# Altium PCB Board_PCB.PcbDoc
Units mm, origin at the board's own origin, x right, y up, seen from the top; angles counter-clockwise.
Board outline 36 x 36 mm, 4 copper layers (L1 (Signal), L2 (GND), L3 (GND), L4 (Signal)), stack 1.586 mm thick; 37 components, 28 nets, 174 pads, 111 vias.
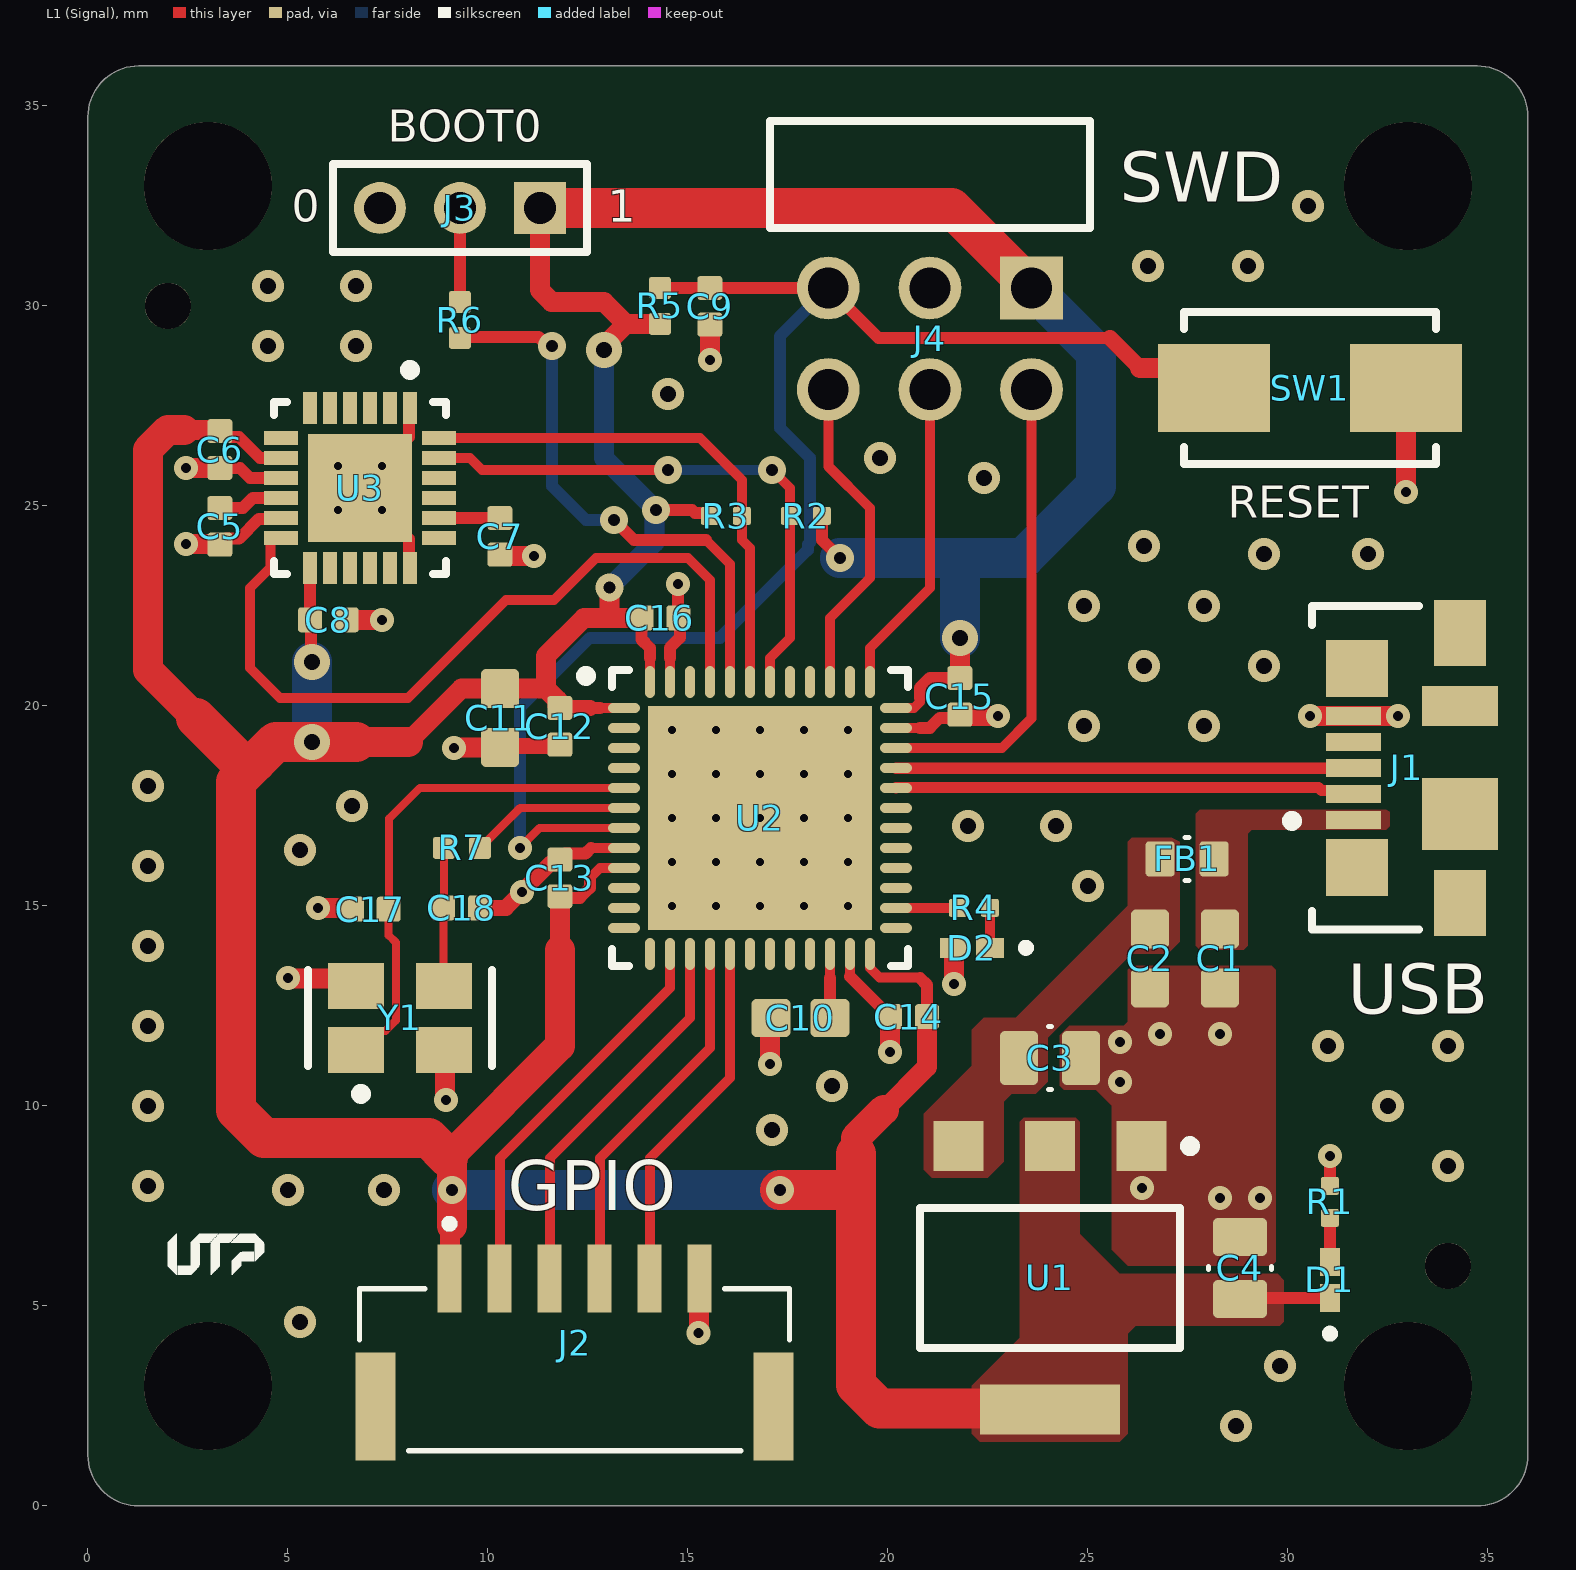
[diagram p0: L1 (Signal) view]
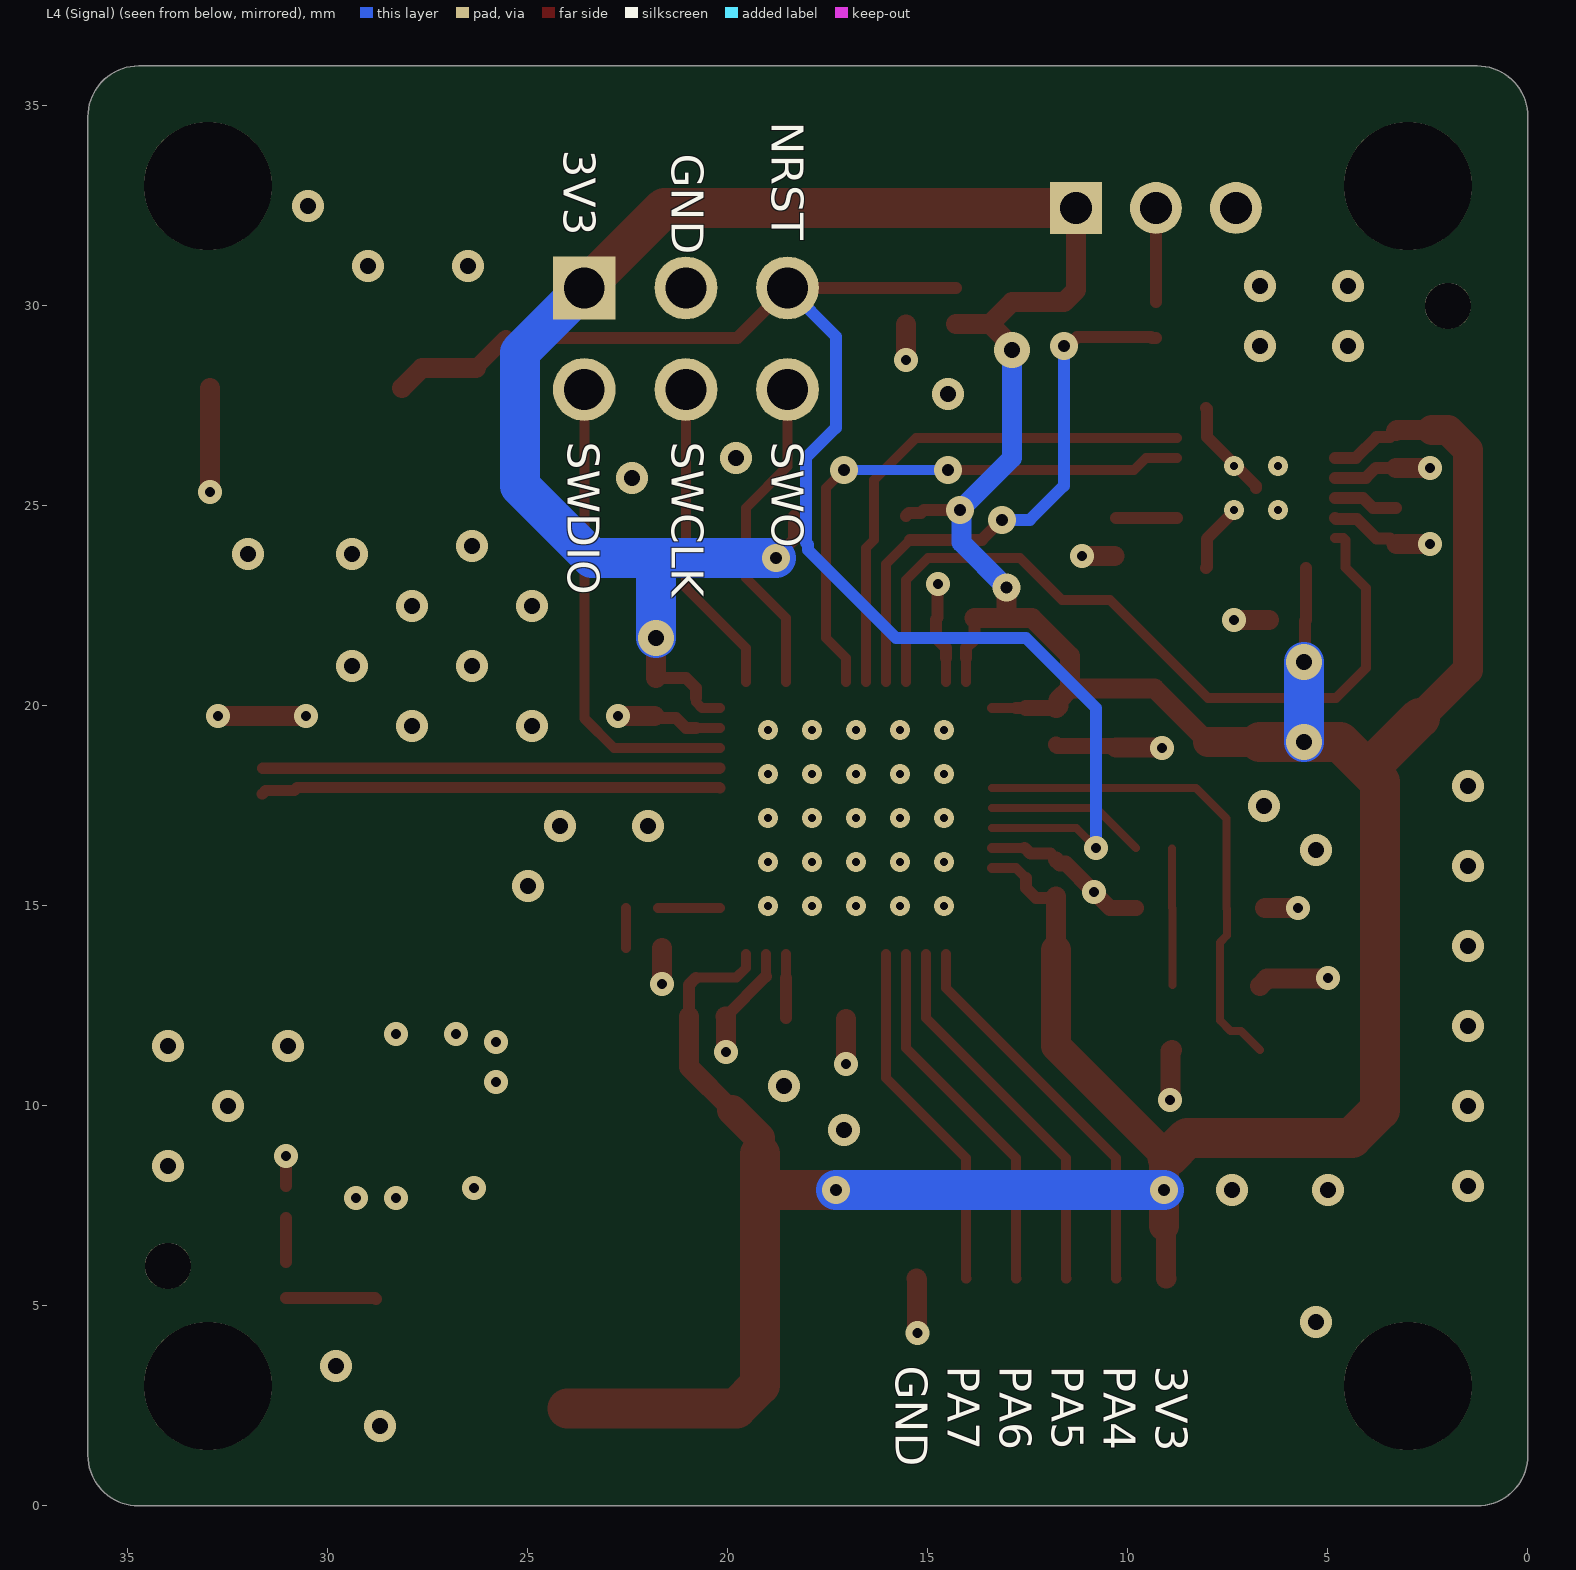
[diagram p1: L4 (Signal) view, seen from below]
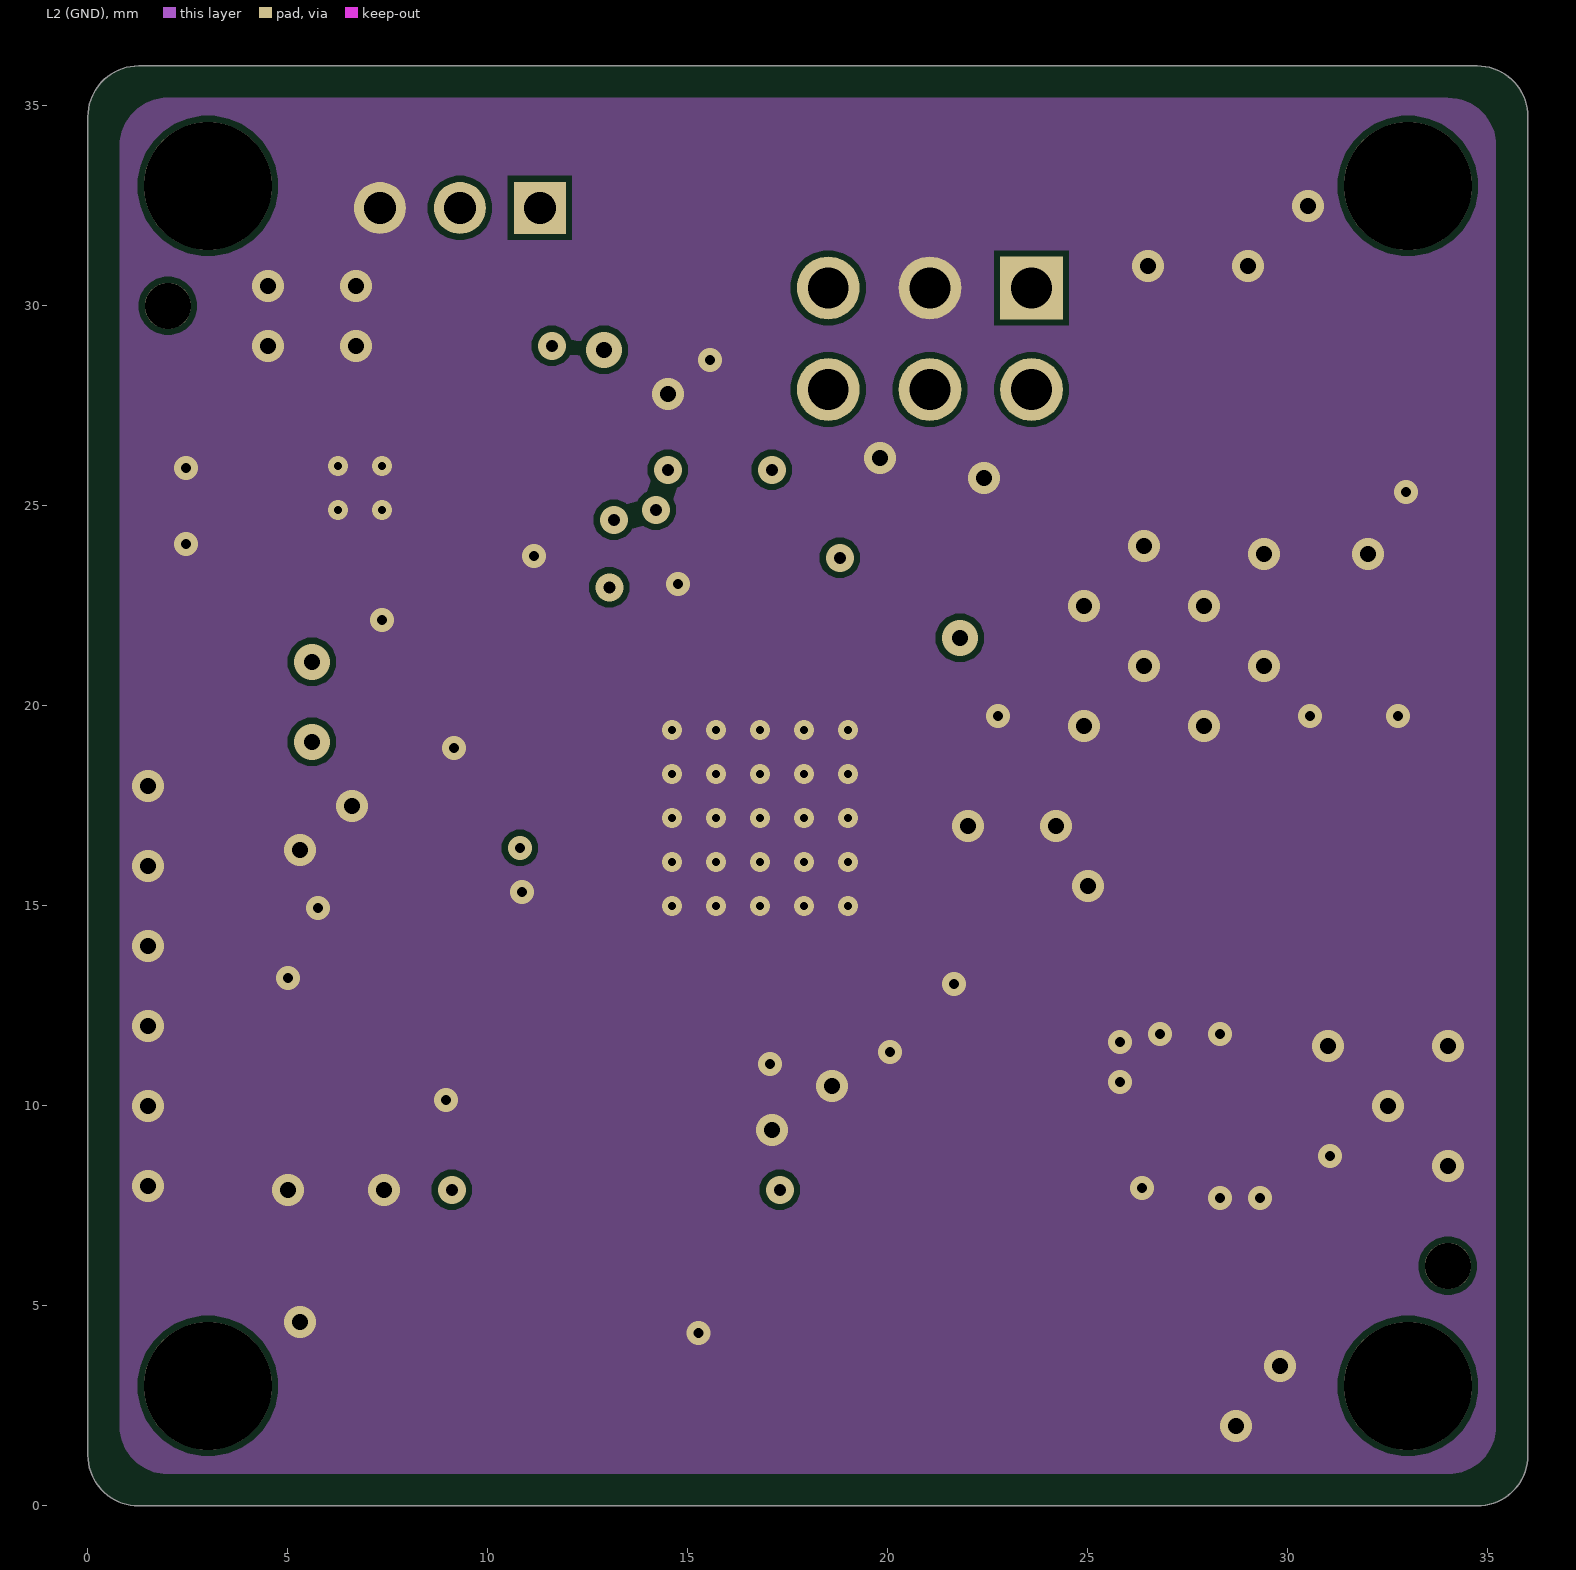
[diagram p2: L2 (GND)]
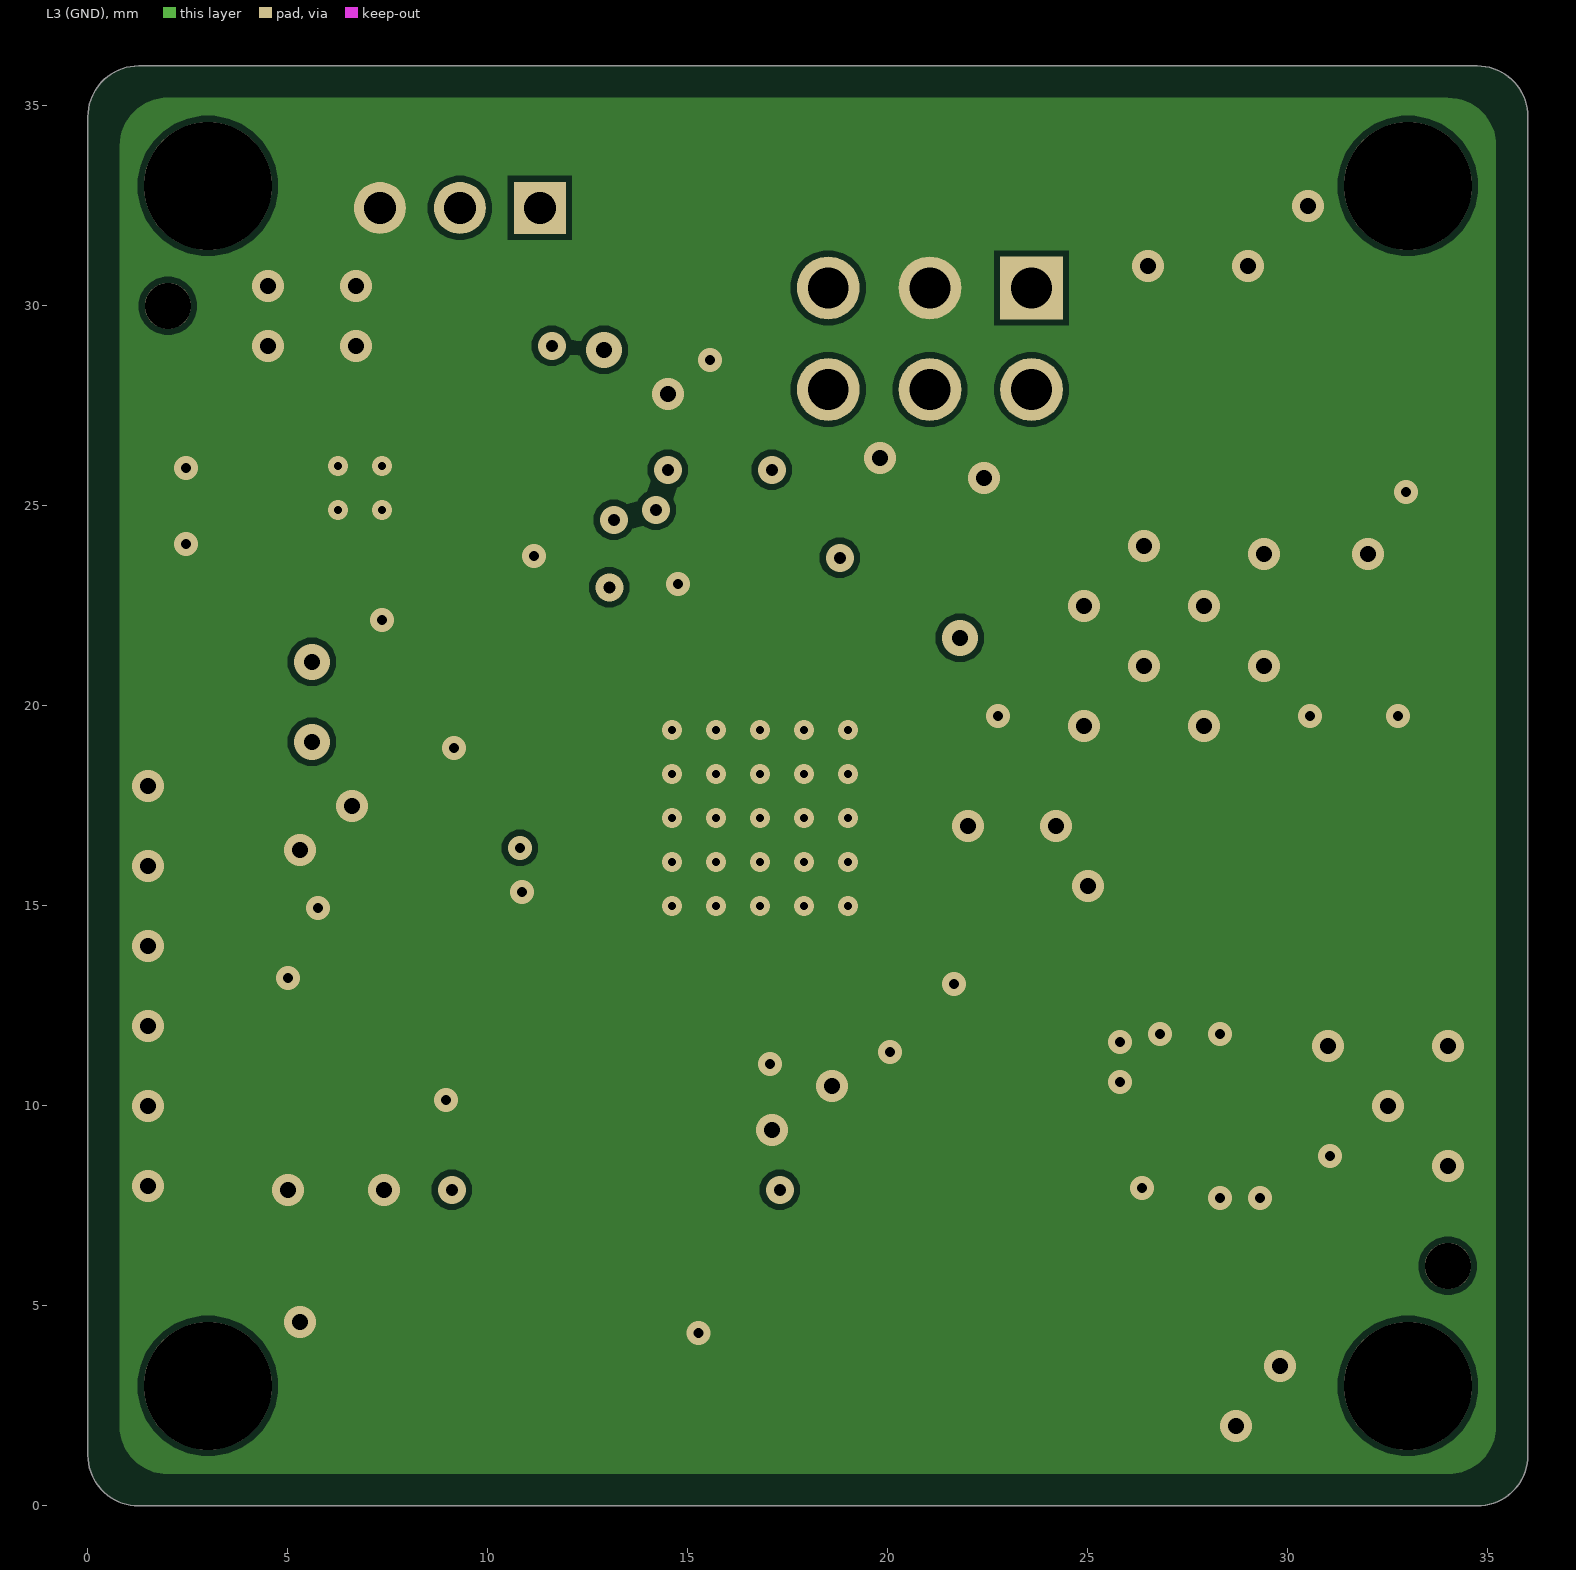
[diagram p3: L3 (GND)]
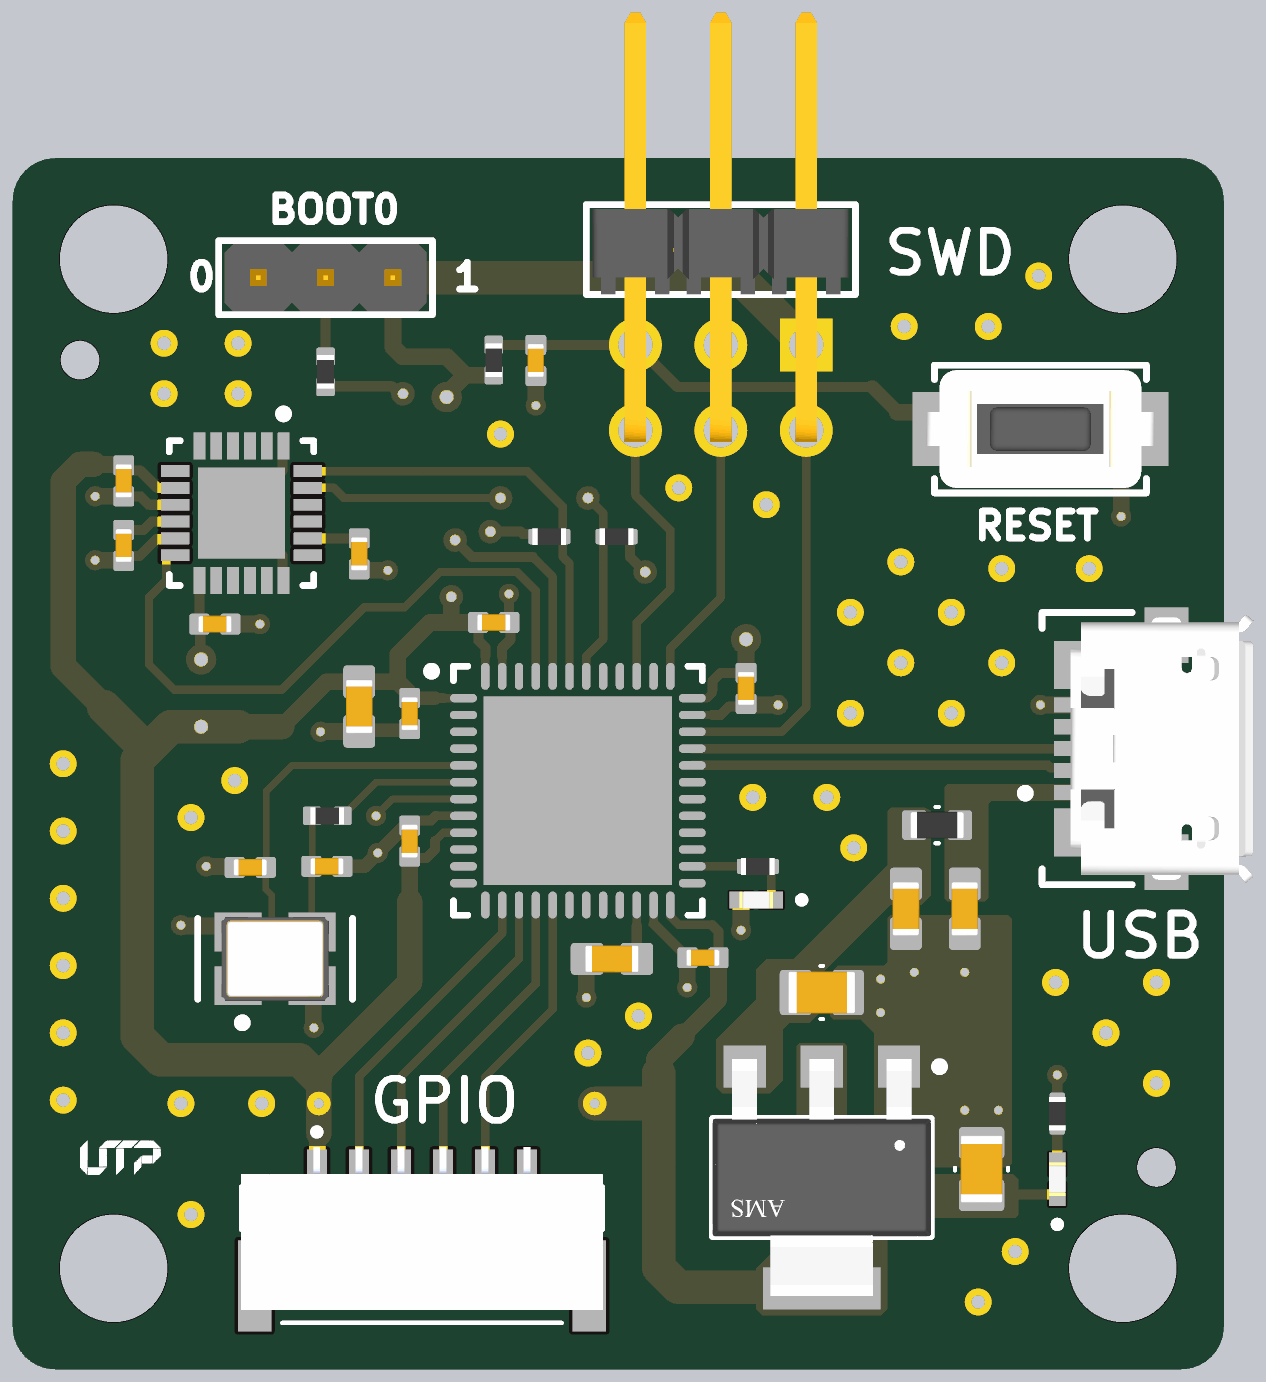
[diagram p4: 3D render of the assembled board from above, using the file's embedded part models]

## Layer stack, top to bottom
Top Solder: solder mask 0.0254, SM-001, Dk 4
L1 (Signal): signal copper 0.035
Dielectric 1: prepreg 0.2104, PP-023, Dk 4.4
L2 (GND): signal copper 0.0152
Dielectric 3: core 1.065, Core-039, Dk 4.6
L3 (GND): signal copper 0.0152
Dielectric 5: prepreg 0.2104, PP-023, Dk 4.4
L4 (Signal): signal copper 0.035
Bottom Solder: solder mask 0.0254, SM-001, Dk 4

## Board outline
0,1.27 ccw(c1.27,1.27) 1.27,0 34.73,0 ccw(c34.73,1.27) 36,1.27 36,34.73 ccw(c34.73,34.73) 34.73,36 1.27,36 ccw(c1.27,34.73) 0,34.73

## Design rules (kind name [scope] priority, off if disabled: settings)
Clearance [All] p1: gap=0.15 ignorepadtopadclearanceinfootprint=TRUE except(0.1: SMDPad-SMDPad; 0.2: Arc-Via Track-Via Via-Via; 0.28: Arc-Hole Track-Hole; 0.45: THPad-THPad)
DiffPairsRouting [All] p1: maxlimit=0.254 minlimit=0.203 mostfreqgap=0.254 toplayer_maxgap=0.203 toplayer_prefgap=0.203 toplayer_minwidth=0.281 toplayer_maxwidth=0.281 toplayer_prefwidth=0.281 bottomlayer_maxgap=0.203 bottomlayer_prefgap=0.203 bottomlayer_minwidth=0.281 bottomlayer_maxwidth=0.281 bottomlayer_prefwidth=0.281 impedanceprofiledriven=TRUE impedanceprofileid={2F17219D-EB1B-4663-A314-4BCB82F3F085} impedanceprofilevalue=90.000000 maxuncoupledlength=12.7
HoleSize [All] p1: absolutevalues=TRUE maxlimit=5.8 minlimit=0.2 maxpercent=80.000 minpercent=20.000
PolygonConnect [All] p1: connectstyle=Direct reliefconductorwidth=0.254 reliefentries=4 polygonreliefangle="90 Angle" airgapwidth=0.254
RoutingVias [All] p1: holewidth=0.3 width=0.7 viastyle="Through Hole" minholewidth=0.2 minwidth=0.5 maxholewidth=0.4 maxwidth=0.9
SolderMaskExpansion [All] p1: expansion=0 istentingtop=FALSE
SupplyNets "Schematic Supply Nets_3" [InNet('VBUS')] p1: voltage=0.000
SupplyNets "Schematic Supply Nets_2" [InNet('+3V3')] p2: voltage=0.000
SupplyNets "Schematic Supply Nets_1" [InNet('GND')] p3: voltage=0.000
SupplyNets "Schematic Supply Nets" [InNet('+5')] p4: voltage=0.000
UnRoutedNet [All] p1: checkbadconnections=TRUE
Width [All] p1: maxlimit=1 minlimit=0.2 preferedwidth=0.3 midlayer1_minwidth=0.254 midlayer1_maxwidth=0.254 midlayer1_prefwidth=0.254 midlayer2_minwidth=0.254 midlayer2_maxwidth=0.254 midlayer2_prefwidth=0.254 minimp=50.000000 maximp=50.000000 favimp=50.000000
27 further rules are at their usual default settings.

## Classes and differential pairs
differential pair class DIFF_USB: USB_D
differential pair USB_D: +USB_D_P -USB_D_N

## Components (designator, comment, footprint, x,y, rotation, side; value= is the part's Value field where it differs from the comment)
C1 "2.2uF" CAPC1608X90N 28.3,13.688 r270 top
C2 "2.2uF" CAPC1608X90N 26.55,13.688 r270 top
C3 "22uF" CAPC2012X95L 24.05,11.2 r0 top
C4 "22uF" CAPC2012X95L 28.8,5.95 r90 top
C5 "100nF" CAPC1005X55N 3.3,24.49 r270 top
C6 "10nF" CAPC1005X55N 3.3,26.41 r270 top
C7 "2.2nF" CAPC1005X55N 10.3,24.24 r270 top
C8 "100nF" CAPC1005X55N 6.01,22.15 r0 top
C9 "100nF" CAPC1005X55N 15.55,29.99 r270 top
C10 "2.2uF" CAPC1608X90N 17.813,12.2 r180 top
C11 "2.2uF" CAPC1608X90N 10.3,19.7 r270 top
C12 "100nF" CAPC1005X55N 11.8,19.49 r270 top
C13 "100nF" CAPC1005X55N 11.8,15.7 r90 top
C14 "100nF" CAPC1005X55N 20.517,12.233 r180 top
C15 "100nF" CAPC1005X55N 21.8,20.24 r270 top
C16 "100nF" CAPC1005X55N 14.3,22.2 r0 top
C17 "10pF" CAPC1005X55N 7.06,14.92 r180 top
C18 "10pF" CAPC1005X55N 9.34,14.95 r0 top
D1 "LED_0402_RED" LEDC0402 31.05,5.65 r90 top
D2 "LED_0402_GREEN" LEDC0402 22.1,13.95 r180 top
FB1 "120R" FBC1608X95L 27.48,16.175 r180 top
J1 "473460001" FP-473460001-MFG 33.95,18.45 r90 top
J2 "SM06B-GHS-TB" SM06B-GHS-TB 12.165,3.804 r0 top
J3 "M22-2010305" FP-M22-2010305-MFG 9.3,32.45 r180 top
J4 "TSW-103-08-G-D-RA" FP-TSW-103-08-G-D-RA-MFG 21.05,33.22 r180 top
R1 "1k" RESC1005X37L 31.05,7.6 r90 top
R2 "2k2" RESC1005X37L 17.95,24.75 r180 top
R3 "2k2" RESC1005X37L 15.95,24.75 r0 top
R4 "1k" RESC1005X37L 22.15,14.95 r0 top
R5 "10k" RESC1005X37N 14.3,30 r90 top
R6 "100k" RESC1005X37N 9.3,29.65 r90 top
R7 "0R" RESC1005X37N 9.35,16.45 r0 top
SW1 "147873-2" FP-147873-2-MFG 30.55,27.95 r0 top
U1 "AMS1117-3.3" FP-AMS1117-IPC_C 24.05,5.7 r270 top
U2 "STM32F411CEU6" STM-UFQFPN48_L 16.8,17.2 r0 top
U3 "MPU-6050" IS-QFN-24_V 6.8,25.45 r270 top
Y1 "24MHz" FP-TSX-3225-MFG 7.8,12.2 r0 top

## Footprints (in the part's own frame and the unit in brackets; to place one, negate y for a bottom-side part, rotate by r counter-clockwise, add the part's x,y. Pads: shape width x height; smd on the part's side, far side on the other; paste and mask are expansions set on the pad)
CAPC1005X55N [mm] "Chip Capacitor, 2-Leads, Body 1,00x0,50mm, IPC Medium Density"
  rrect25% 0.6x0.62 smd: 1(-0.46,0) 2(0.46,0)
  body extent -0.5,-0.25 0.5,0.25, height 0.55
CAPC1608X90N [mm] "Chip Capacitor, 2-Leads, Body 1,60x0,80mm, IPC Medium Density"
  rrect25% 0.975x0.95 smd: 1(-0.737,0) 2(0.738,0)
  body extent -0.8,-0.4 0.8,0.4, height 0.9
CAPC2012X95L [mm] "Chip Capacitor, 2-Leads, Body 2,00x1,25mm, IPC High Density"
  rrect25% 0.95x1.35 smd: 1(-0.775,0) 2(0.775,0)
  silkscreen extent -0.04,-0.79 0.04,0.79, body extent -1,-0.63 1,0.63, height 0.95
FBC1608X95L [mm] "Chip Ferrite Bead, 2-Leads, Body 1,60x0,80mm, IPC High Density"
  rrect25% 0.73x0.88 smd: 1(-0.675,0) 2(0.675,0)
  silkscreen extent -0.05,-0.54 0.05,0.54, body extent -0.8,-0.4 0.8,0.4, height 0.95
FP-147873-2-MFG [mm]
  rect 2.8x2.2 smd paste+0 mask+0: 1(-2.4,0) 2(2.4,0)
  silkscreen extent -3.15,-1.9 3.15,1.9, body extent -3.9,-2 3.9,2, height 0.25
FP-473460001-MFG [mm]
  rect 0.45x1.38 smd paste+0 mask+0: 1(-1.3,2.31) 2(-0.65,2.31) 3(0,2.31) 4(0.65,2.31) 5(1.3,2.31)
  rect 1.425x1.55 smd paste+0 mask+0: 6(-2.488,2.225) 7(2.488,2.225)
  rect 1.65x1.3 smd paste+0 mask+0: 8(-3.375,-0.35) 11(3.375,-0.35)
  rect 1.8x1.9 smd paste+0 mask+0: 9(-1.15,-0.35)
  rect 1x1.9 smd paste+0 mask+0: 10(1.55,-0.35)
  silkscreen extent -4.05,0.67 4.05,3.97, body extent -4.3,-2.48 4.3,3.45, height 0.25
FP-AMS1117-IPC_C [mm]
  rect 1.25x1.25 smd paste+0 mask+0: 1(-3.295,2.29) 2(-3.295,0) 3(-3.295,-2.29)
  rect 1.25x3.5 smd paste+0 mask+0: 4(3.295,0)
  silkscreen extent -3.42,-3.25 1.75,3.63, body extent -3.9,-3.35 3.9,3.35, height 0.25
FP-M22-2010305-MFG [mm]
  rect 1.3x1.3 hole 0.8 paste-2539.97 mask+0: 1(-2,0)
  round 1.3 hole 0.8 paste-2539.97 mask+0: 2(0,0) 3(2,0)
  silkscreen extent -3.17,-1.1 3.17,1.1, body extent -3.27,-1.2 3.27,1.2, height 0.25
FP-TSW-103-08-G-D-RA-MFG [mm]
  rect 1.57x1.57 hole 1.02 paste-2539.97 mask+0: 1(-2.54,2.77)
  round 1.57 hole 1.02 paste-2539.97 mask+0: 2(-2.54,5.31) 3(0,2.77) 4(0,5.31) 5(2.54,2.77) 6(2.54,5.31)
  silkscreen extent -4,-1.4 4,1.27, body extent -4.1,-7.54 4.1,6.19, height 0.25
FP-TSX-3225-MFG [mm]
  rect 1.4x1.15 smd paste+0 mask+0: 1(-1.1,-0.8) 2(1.1,-0.8) 3(1.1,0.8) 4(-1.1,0.8)
  silkscreen extent -2.3,-2.02 2.3,1.2, body extent -1.9,-1.48 1.9,1.48, height 0.25
IS-QFN-24_V [mm] "QFN, 24-Leads, Body 4x4mm, Pitch 0.5mm, Thermal Pad 2.7x2.6mm"
  rect 0.8x0.35 smd: 1(-2,1.25) 2(-2,0.75) 3(-2,0.25) 4(-2,-0.25) 5(-2,-0.75) 6(-2,-1.25) 13(2,-1.25) 14(2,-0.75) 15(2,-0.25) 16(2,0.25) 17(2,0.75) 18(2,1.25)
  rect 0.35x0.85 smd mask+0.102: 7(-1.25,-1.975) 8(-0.75,-1.975) 9(-0.25,-1.975) 10(0.25,-1.975) 11(0.75,-1.975) 12(1.25,-1.975) 19(1.25,1.975) 20(0.75,1.975) 21(0.25,1.975) 22(-0.25,1.975) 23(-0.75,1.975) 24(-1.25,1.975)
  rect 2.7x2.6 smd: 25(0,0)
  silkscreen extent -3.07,-2.15 2.15,2.15, body extent -2,-2 2,2, height 0.95
LEDC0402 [mm]
  rect 0.7x0.5 smd mask+0.05: 1(-0.45,0) 2(0.45,0)
  silkscreen extent -1.44,-0.1 -1.24,0.1, body extent -0.5,-0.25 0.5,0.25, height 0.5
RESC1005X37L [mm] "Chip Resistor, 2-Leads, Body 1,00x0,50mm, IPC High Density"
  rrect25% 0.45x0.45 smd: 1(-0.4,0) 2(0.4,0)
  body extent -0.5,-0.25 0.5,0.25, height 0.37
RESC1005X37N [mm] "Chip Resistor, 2-Leads, Body 1,00x0,50mm, IPC Medium Density"
  rrect25% 0.55x0.55 smd: 1(-0.45,0) 2(0.45,0)
  body extent -0.5,-0.25 0.5,0.25, height 0.37
SM06B-GHS-TB [mm]
  rect 0.6x1.7 smd paste+0 mask+0.102: 1(-3.125,1.875) 2(-1.875,1.875) 3(-0.625,1.875) 4(0.625,1.875) 5(1.875,1.875) 6(3.125,1.875)
  rect 1x2.7 smd paste+0 mask+0.102: MP1(-4.975,-1.325) MP2(4.975,-1.325)
  silkscreen extent -5.38,-2.42 5.38,3.35, body extent -5.38,-2.05 5.38,2.8, height 4.25
STM-UFQFPN48_L [mm] "QFN, 48-Leads, Body 7.1x7.1mm, Pitch 0.5mm, Thermal Pad 5.6x5.6mm, IPC High Density"
  oval 0.8x0.25 smd: 1(-3.4,2.75) 2(-3.4,2.25) 3(-3.4,1.75) 4(-3.4,1.25) 5(-3.4,0.75) 6(-3.4,0.25) 7(-3.4,-0.25) 8(-3.4,-0.75) 9(-3.4,-1.25) 10(-3.4,-1.75) 11(-3.4,-2.25) 12(-3.4,-2.75) 25(3.4,-2.75) 26(3.4,-2.25) 27(3.4,-1.75) 28(3.4,-1.25) 29(3.4,-0.75) 30(3.4,-0.25) 31(3.4,0.25) 32(3.4,0.75) 33(3.4,1.25) 34(3.4,1.75) 35(3.4,2.25) 36(3.4,2.75)
  oval 0.25x0.8 smd: 13(-2.75,-3.4) 14(-2.25,-3.4) 15(-1.75,-3.4) 16(-1.25,-3.4) 17(-0.75,-3.4) 18(-0.25,-3.4) 19(0.25,-3.4) 20(0.75,-3.4) 21(1.25,-3.4) 22(1.75,-3.4) 23(2.25,-3.4) 24(2.75,-3.4) 37(2.75,3.4) 38(2.25,3.4) 39(1.75,3.4) 40(1.25,3.4) 41(0.75,3.4) 42(0.25,3.4) 43(-0.25,3.4) 44(-0.75,3.4) 45(-1.25,3.4) 46(-1.75,3.4) 47(-2.25,3.4) 48(-2.75,3.4)
  rect 5.6x5.6 smd: 49(0,0)
  silkscreen extent -4.47,-3.7 3.7,3.7, body extent -3.55,-3.55 3.55,3.55, height 0.6

## Part data
C1 C2 C10 C11: library part CAP_0603_16V, "Capacitor SMD 0603 16V"
C3 C4: library part CAP_0805_16V, "Capacitor SMD 0805 16V"
C5 C6 C7 C8 C9 C12 C13 C14 C15 C16 C17 C18: library part CAP_0402_16V, "Capacitor SMD 0402 16V"
D1: "LED RED SMD 0402"
D2: "LED GREEN SMD 0402"
FB1: library part FB_0603, "Ferrite Bead SMD 0603"
J1: library part CMP-2000-05246-2, "CONN RCPT USB2.0 MICRO B SMD R/A", Current Rating=1.8A, Manufacturer=Molex, Package=0, Temperature="-30°C to +85°C", Temperature Range High=+85°C, Temperature Range Low=-30°C, Voltage Rating=30V, Automotive=No, Category=Conn, ComponentLink2Description=Datasheet, ComponentLink2URL=https://www.molex.com/webdocs/datasheets/pdf/en-us/0473460001_IO_CONNECTORS.pdf, Conn Orientation="Right Angle", Contact Material=Gold,Nickel, Device Class L1=Connectors, Device Class L2="USB Connectors", Device Class L3=unset, Digikey Description="CONN RCPT USB2.0 MICRO B SMD R/A", Footprint Url=https://www.molex.com/pdm_docs/sd/473460001_sd.pdf, Height=2.945mm, Is Female=yes, Lead Free=Yes, Manufacturer Part Number=473460001, Number Of Contacts=5, Octopart=https://octopart.com/47346-0001-molex-7164928, Pitch=0.65mm, RoHS=TRUE, Shielding=true, Usb Standard="USB 2.0"
J2: "Header Connector 6-Pin"
J3: library part CMP-15831-000100-1, "CONN HEADER VERT 3POS 2MM", Case/Package=SIL, Color=Black, Contact Resistance=20mR, Current Rating=1A, Flammability Rating="UL94 V-0", Insulation Resistance=10GR, Max Operating Temperature=105°C, Min Operating Temperature=-55°C, Package Quantity=1000, Voltage Rating=650V, Voltage Rating (AC)=250V, Connector Type="Male Pin", Contact Finish - Mating=GOLD, Contact Material=Bronze, Contact Mating Length=0.138inch, Contact Plating=Gold, Contact Shape=Square, Contact Type="Male Pin", Depth=2mm, Fastening Type=Pull, Housing Color=Black, Housing Material=Nylon, Insulation Color=Black, Insulation Material=Nylon, Lead Pitch=2mm, Length=6mm, Mated Stacking Heights=8.6mm, Max Current Rating=1A, Mount="Through Hole", Number Of Contacts=3, Number of Positions=3, Number of Rows=1, Orientation=Straight, Packaging=Bulk, Pitch=2mm, Radiation Hardening=No, Reach SVHC Compliant=Yes, RoHS Compliant=Yes, Series=M22, Termination=Solder, Working Voltage=250V
J4: library part CMP-02766-000904-1, "CONN HEADER R/A 6POS 2.54MM", Color=Black, Max Current Rating=7.6A, Max Operating Temperature=125°C, Max Voltage Rating (AC)=450V, Min Operating Temperature=-55°C, Package Quantity=1, Connector Type="Male Pin", Contact Material=Bronze, Contact Mating Length=0.23inch, Contact Plating=Gold, Depth=12.44mm, Gender=Male, Housing Color=Black, Housing Material=Polyester, Lead Free="Lead Free", Length=7.62mm, Mount="Through Hole", Number Of Contacts=6, Number of Positions=6, Number of Rows=2, Orientation="Right Angle", Packaging=Bulk, Pitch=2.54mm, Radiation Hardening=No, REACH SVHC="No SVHC", Row Spacing=0.1inch, Termination=Solder, Width=2.54mm
R1 R2 R3 R4 R5 R6 R7: library part RES_0402, "Resistor SMD 0402"
SW1: library part CMP-03402-000024-1, "SWITCH TACTILE SPST-NO 0.05A 24V", Case/Package=SMD/SMT, Color=Black, Contact Current Rating=50mA, Contact Resistance=100mR, Max Operating Temperature=85°C, Max Voltage Rating (DC)=12V, Min Operating Temperature=-35°C, Operating Force=1.77N, Package Quantity=1, Actuator Length=0.031inch, Actuator Material=Polyphenylene, Contact Material="Copper Alloy", Contact Plating=Silver, Current Rating=50mA, Depth=6.8mm, Electrical Life=40000Cycles, ELV=Compliant, Height=4.3mm, Housing Material=Thermoplastic, Illumination Type=Non-Illuminated, Lead Free="Lead Free", Length=3.5mm, Material=Polyamide, Max Current Rating=50mA, Mechanical Life=40000Cycles, Mount="Surface Mount", Orientation=Straight, Packaging="Tape and Reel", Radiation Hardening=No, RoHS Compliant=Yes, Series="FSMJM, Alcoswitch", Size=6mm, Switch Function=Off-Mom, Switch Travel=0.25mm, Termination=J-Bend, Throw Configuration=SPST, Type=Switch, Voltage Rating (DC)=12V
U1: library part CMP-209535-000001-1, "LDO Voltage Regulators 1A, 3.3V", Dropout Voltage=1.1V, Manufacturer="Advanced Monolithic Systems", Max Junction Temp=+125°C, Max Power Dissipation=1.2W, Max Supply Voltage=15V, Nominal Supply Current=5mA, Output Current=1A, Output Voltage=3.3V, Package=AMS1117, Temperature="-40°C to +125°C", Temperature Range Low=-40°C, Automotive=No, Category=IC, ComponentLink2Description=Datasheet, ComponentLink2URL=http://www.advanced-monolithic.com/pdf/ds1117.pdf, Device Class L1="Integrated Circuits (ICs)", Device Class L2="Power Management ICs", Device Class L3="Voltage Regulators - Linear", Height=1.8mm, Ipc Land Pattern Name=SOT229P700X180-4, Lead Free=Yes, Manufacturer Part Number=AMS1117-3.3, Number Of Outputs=1, Octopart=https://octopart.com/ams1117-3.3-advanced+monolithic+systems-25899300, Output Type=Fixed, RoHS=TRUE, Standoff Height=0.64mm, Temperature Range High=+125°C
U2: library part CMP-0243-00165-1, "ARM Cortex-M4 32-bit MCU+FPU, 512 KB Flash, 128 KB RAM, 36 I/Os, 48-Pin UFQFPN, -40 to 85 degC, Tray", I/Os (High Current)=36, Operating Frequency(F) (Processor speed) (MHz)=100, Package Description=UFQFPN48, Package Reference="48-Pin Ultra Thin Fine Pitch Quad Flat No-Lead, 7 x 7 x 0.6 mm Body, 0.5 mm Pitch, Exposed Pad", Supply Voltage(Vcc) min (V)=1.7, ComponentLink1Description="Manufacturer URL", ComponentLink1URL=http://www.st.com/, ComponentLink2Description=Datasheet, ComponentLink2URL=http://www.st.com/st-web-ui/static/active/en/resource/technical/document/datasheet/DM00115249.pdf, Core="ARM Cortex-M4", DatasheetVersion="Rev. 6", FLASH Size (Prog) (kB)=512, Internal RAM Size (kB)=128, Mounting Technology="Surface Mount", Packing=Tray
U3: library part CMP-1753-00002-2, "3-Axis Gyroscope, Accelerometer and a Digital Motion Processor(TM) (DMP), 2.375 to 3.46 V, -40 to 85 degC, 24-Pin QFN, RoHS, Tape and Reel", Manufacturer=InvenSense, Standard Package=5,000, Category=Sensors,Transducers, Datasheet URL=http://datasheet.octopart.com/MPU-6050-InvenSense-datasheet-14421344.pdf, Datasheet Version="Rev. 3.3, 05/2012", Dynamic Catalog=MPU-6000™Series, Family=Multifunction, Featured Product=MPU-60506-Axis,IntegratedI²CSolution, Manufacturer URL=http://www.invensense.com/, Online Catalog=MPU-6000™Series, Other Names="1428-1007-2 / MPU6050", Output Type=Digital, Sensor Type=MotionTracking, Unit PriceUSD=Digital
Y1: library part CMP-36405-000018-1, "CRYSTAL 24.0000MHZ 9PF SMD", Case/Package=SMD/SMT, ESR (Equivalent Series Resistance)=40R, Frequency Stability=20ppm, Frequency Tolerance=10ppm, Load Capacitance=9pF, Max Operating Temperature=105°C, Min Operating Temperature=-40°C, Package Quantity=250, Depth=2.5mm, Drive Level=200uW, Frequency=24MHz, Height=0.024inch, Lead Free="Lead Free", Length=3.2mm, Mount="Surface Mount", Number of Pins=4, Packaging="Tape and Reel", RoHS Compliant=Yes, Series=TSX-3225, Termination=SMD/SMT, Tolerance=10ppm, Weight=0.000564oz, Width=2.5mm

## Free pads (board coordinates)
  round 1.152 hole 1.152 unplated mask+0.025: MH(2,30) MH(34,6)
  round 3.2 hole 3.2 unplated mask+0.025: MH(3,3) MH(3,33) MH(33,3) MH(33,33)

## Via types
v1: diameter 0.8, hole 0.4, L1 (Signal) to L4 (Signal), 41 vias
v2: diameter 0.5, hole 0.2, L1 (Signal) to L4 (Signal), 29 vias
v3: diameter 0.6, hole 0.25, L1 (Signal) to L4 (Signal), tented top, 28 vias
v4: diameter 0.7, hole 0.3, L1 (Signal) to L4 (Signal), tented top, 7 vias
v5: diameter 0.9, hole 0.4, L1 (Signal) to L4 (Signal), tented top, 4 vias
v6: diameter 0.7, hole 0.3, L1 (Signal) to L4 (Signal), 2 vias

## Nets (pads, with @x,y where several pads share a name; then routed paths per layer and width w, separated by ;. In a path a pad name is that pad's centre, name@x,y a point inside that pad or via, vN(x,y) a via of type N, cw(c..) or ccw(c..) an arc to the next point about the centre after c; other vN are vias at no path point)
+3V3: C4.1 C6.1 C8.1 C11.1 C12.1 C13.1 C14.1 C15.1 C16.1 D1.1 J2.1 J3.1 J4.1 R2.1 R3.1 R5.1 U1.2 U1.4 U2.1 U2.9 U2.24 U2.36 U2.48 U3.8 U3.13 | length 138.1
  L1 (Signal) w0.25: 12.55,15.7 12.8,15.95 U2.9 ; 12.8,19.95 U2.1 ; U2.48 14.05,21.2 ; U2.24 19.55,13.45 19.789,13.211 20.789,13.211 ; U2.36 20.654,19.95 20.8,20.096 20.8,20.2
  L1 (Signal) w0.3: C6.1 3.45,26.72 3.78,26.72 4.3,26.2 U3.8 ; U3.13 C8.1 5.575,22.125 5.575,21.125 v5(5.6,21.1) ; C13.1 11.84,15.2 12.3,15.2 12.55,15.45 12.55,15.7 ; 12.55,19.95 12.8,19.95 ; C16.1 13.84,21.66 14.05,21.45 14.05,21.2 ; v4(14.2,24.9) 15.1,24.9 15.175,24.825 15.475,24.825 R3.1 ; R2.1 18.35,24.15 v4(18.8,23.7) ; 20.8,13.2 20.977,13.023 C14.1 ; 20.8,20.2 20.8,20.45 21.05,20.7 C15.1 ; C4.1 28.825,5.2 D1.1
  L1 (Signal) w0.4: C12.1 12.55,19.95
  L1 (Signal) w0.5: 2.4,26.9 3.27,26.9 C6.1 ; 8,19.1 9.337,20.438 C11.1 11.447,20.438 ; J2.1 9.05,5.689 9.05,6.95 9.1,7 ; J3.1 11.3,30.393 11.593,30.1 12.9,30.1 13.45,29.55 ; 11.8,13.9 C13.1 ; C12.1 11.79,19.95 11.74,20 11.74,20.145 11.447,20.438 ; v5(12.9,28.9) 12.9,29 13.45,29.55 ; v4(13.038,22.962) 13.038,22.282 13.12,22.2 ; C16.1 13.12,22.2 ; R5.1 13.45,29.55 ; 19.9,9.9 20.977,10.977 C14.1 ; C15.1 v5(21.8,21.7) ; 11.447,20.438 11.447,21.247 12.4,22.2 13.12,22.2
  L1 (Signal) w0.75: 2.4,26.9 2,26.9 1.5,26.4 1.5,20.9 2.7,19.7 ; 6.7,19.1 8,19.1 ; 9.007,8.707 11.8,11.5 11.8,13.9 ; 9.1,7 v6(9.1,7.9) 9.1,8.614 ; 19.2,8.8 19.2,9.2 19.9,9.9
  L1 (Signal) w1: 2.7,19.7 3.8,18.6 4.2,18.6 ; 6.7,19.1 v5(5.6,19.1) 4.7,19.1 4.2,18.6 ; 9.007,8.707 8.514,9.2 4.4,9.2 3.7,9.9 3.7,18.1 4.2,18.6 ; J3.1 21.59,32.45 J4.1 ; v6(17.3,7.9) 19.2,7.9 ; 19.2,8.8 19.2,7.9 ; U1.4@24.015,2.44 19.786,2.44 19.2,3.026 19.2,7.9
  L4 (Signal) w0.5: v5(12.9,28.9) 12.9,26.2 v4(14.2,24.9) 14.162,24.862 14.162,24.085 v4(13.038,22.962)
  L4 (Signal) w1: v5(5.6,19.1) v5(5.6,21.1) ; v6(9.1,7.9) v6(17.3,7.9) ; v4(18.8,23.7) 21.8,23.7 ; v5(21.8,21.7) 21.8,23.7 ; J4.1 25.2,28.84 25.2,25.5 23.4,23.7 21.8,23.7
+5: C2.1 C3.1 FB1.2 U1.3
GND: C1.2 C2.2 C3.2 C4.2 C5.2 C6.2 C7.2 C8.2 C9.2 C10.2 C11.2 C12.2 C13.2 C14.2 C15.2 C16.2 C17.2 C18.2 D2.2 J1.5 J2.6 J3.3 J4.3 R1.2 SW1.2 U1.1 U2.8 U2.23 U2.35 U2.47 U2.49 U3.1 U3.9 U3.11 U3.18 U3.25 Y1.2 Y1.4 | length 39.6
  L1 (Signal) w0.25: 12.58,16.45 U2.8 ; U2.47 14.55,21.2 ; 19.05,13.24 U2.23 ; U2.35 20.8,19.45
  L1 (Signal) w0.3: C5.2 3.45,24.18 3.78,24.18 4.275,24.675 4.8,24.675 U3.11 ; C6.2 3.8,25.95 4.05,25.7 U3.9 ; U3.25 6.8,25.5 8.025,26.725 8.025,27.425 U3.1 ; U3.25@7.325,24.875 8.025,24.175 8.025,23.475 U3.18 ; C13.2@11.933,16.31 12.44,16.31 12.58,16.45 ; 14.55,21.2 14.55,21.45 14.8,21.7 14.8,22.16 14.755,22.205 14.755,23.045 v3(14.75,23.05) ; 19.05,13.24 C14.2 ; 20.8,19.45 21.05,19.45 21.3,19.7 21.72,19.7 C15.2 ; R1.2 v3(31.05,8.75)
  L1 (Signal) w0.4: C18.2 10.45,14.95 v3(10.85,15.35) ; C11.2 10.334,18.996 11.766,18.996 C12.2 ; v3@10.85,15.351 11.559,16.06 11.7,16.06 C13.2
  L1 (Signal) w0.5: v3(2.45,24.05) C5.2@3.28,24.05 ; v3(2.45,25.95) C6.2 ; v3(5,13.2) 5.019,13.181 6.519,13.181 Y1.4 ; v3(5.75,14.95) C17.2@6.57,14.95 ; C8.2 v3(7.35,22.15) ; Y1.2 8.931,11.369 8.931,10.169 v3(8.95,10.15) ; v3(9.15,18.95) 9.156,18.956 10.294,18.956 C11.2 ; C7.2@10.33,23.75 v3(11.15,23.75) ; v3(15.261,4.321) 15.276,4.335 15.276,5.665 J2.6 ; v3(15.55,28.65) C9.2 ; v3(17.05,11.05) C10.2@17.05,12.175 ; v3(20.05,11.35) 20.053,11.353 20.053,12.23 C14.2 ; v3(21.65,13.05) D2.2 ; C15.2@21.83,19.75 v3(22.75,19.75) ; v3(30.55,19.75) v3(32.75,19.75) ; v3(32.95,25.35) SW1.2
  other v1: 28.7,2 29.8,3.5 5.3,4.6 5,7.9 7.4,7.9 1.5,8 34,8.5 17.1,9.4 1.5,10 32.5,10 18.6,10.5 31,11.5 34,11.5 1.5,12 1.5,14 25,15.5 1.5,16 5.3,16.4 22,17 24.2,17 6.6,17.5 1.5,18 24.9,19.5 27.9,19.5 26.4,21 29.4,21 24.9,22.5 27.9,22.5 29.4,23.8 32,23.8 26.4,24 22.4,25.7 19.8,26.2 14.5,27.8 4.5,29 6.7,29 4.5,30.5 6.7,30.5 26.5,31 29,31 30.5,32.5
  other v2: 14.6,15 15.7,15 16.8,15 17.9,15 19,15 14.6,16.1 15.7,16.1 16.8,16.1 17.9,16.1 19,16.1 14.6,17.2 15.7,17.2 16.8,17.2 17.9,17.2 19,17.2 14.6,18.3 15.7,18.3 16.8,18.3 17.9,18.3 19,18.3 14.6,19.4 15.7,19.4 16.8,19.4 17.9,19.4 19,19.4 6.25,24.9 7.35,24.9 6.25,26 7.35,26
  other v3: 28.3,7.7 29.3,7.7 26.35,7.95 25.8,10.6 25.8,11.6 26.8,11.8 28.3,11.8
HEADER_BOOT0: J3.2 R6.2 | length 2.4
  L1 (Signal) w0.3: R6.2 J3.2
IMU_CPOUT: C7.1 U3.20 | length 1.5
  L1 (Signal) w0.3: U3.20 C7.1
IMU_INT: U2.45 U3.12 | length 19.7
  L1 (Signal) w0.25: U3.12 4.614,24.2 4.564,24.15 4.564,23.464 4.05,22.95 4.05,20.95 4.8,20.2 8,20.2 10.45,22.65 11.65,22.65 12.7,23.7 15,23.7 15.55,23.15 U2.45
IMU_REGOUT: C5.1 U3.10 | length 1.6
  L1 (Signal) w0.3: C5.1 3.878,24.95 4.128,25.2 U3.10
IMU_SCL: R2.2 U2.42 U3.23 | length 14.1
  L1 (Signal) w0.25: U3.23 9.55,26.2 9.85,25.9 v4(14.5,25.9) ; U2.42 17.05,21.2 17.55,21.7 17.55,25.45 v4(17.1,25.9)
  L4 (Signal) w0.25: v4(14.5,25.9) v4(17.1,25.9)
IMU_SDA: R3.2 U2.43 U3.24 | length 13.1
  L1 (Signal) w0.25: U3.24 15.3,26.7 16.35,25.65 R3.2 16.35,24.15 16.55,23.95 U2.43
LED_PWR_K: D1.2 R1.1 | length 1.1
  L1 (Signal) w0.3: D1.2 R1.1
MCU_BOOT0: R6.1 U2.44 | length 14.1
  L1 (Signal) w0.25: 15.45,24.15 16.05,23.55 U2.44
  L1 (Signal) w0.3: R6.1 9.402,29.2 9.425,29.223 11.269,29.223 11.492,29 v4(11.6,29) ; v4(13.15,24.65) 13.65,24.15 15.45,24.15
  L4 (Signal) w0.3: v4(11.6,29) 11.6,25.5 12.45,24.65 v4(13.15,24.65)
MCU_LED_A: D2.1 R4.2 | length 1
  L1 (Signal) w0.25: D2.1 R4.2
MCU_NRST: C9.1 J4.5 R5.2 SW1.1 U2.7 | length 37.4
  L1 (Signal) w0.2: v3(10.8,16.45) 10.8,16.46 11.29,16.95 U2.7
  L1 (Signal) w0.3: R5.2 C9.1 J4.5 19.76,29.2 25.55,29.2
  L1 (Signal) w0.4: 25.55,29.2 26.3,28.45
  L1 (Signal) w0.5: 26.3,28.45 27.65,28.45 SW1.1
  L4 (Signal) w0.3: v3(10.8,16.45) 10.8,19.95 12.55,21.7 15.8,21.7 18,23.9 18,24.031 18.05,24.081 18.05,26.2 17.3,26.95 17.3,29.24 J4.5
MCU_OSC_IN: C17.1 U2.5 Y1.1 | length 12.6
  L1 (Signal) w0.2: Y1.1 7.175,11.875 7.434,11.875 7.7,12.141 7.7,14.085 7.52,14.265 C17.1 ; C17.1@7.533,14.933 7.533,17.186 8.298,17.95 U2.5
MCU_OSC_OUT: R7.2 U2.6 | length 4
  L1 (Signal) w0.2: R7.2 10.8,17.45 U2.6
MCU_PA4: J2.2 U2.14 | length 9.9
  L1 (Signal) w0.25: J2.2 10.3,5.689 10.3,8.7 14.55,12.95 U2.14
MCU_PA5: J2.3 U2.15 | length 9.6
  L1 (Signal) w0.25: J2.3 11.55,5.689 11.55,8.7 15.05,12.2 U2.15
MCU_PA6: J2.4 U2.16 | length 9.3
  L1 (Signal) w0.25: J2.4 12.8,5.689 12.8,8.7 15.55,11.45 U2.16
MCU_PA7: J2.5 U2.17 | length 9
  L1 (Signal) w0.25: J2.5 14.05,5.689 14.05,8.7 16.05,10.7 U2.17
MCU_PB13: R4.1 U2.26 | length 1.6
  L1 (Signal) w0.25: U2.26 R4.1
MCU_SWCLK: J4.4 U2.37 | length 7.9
  L1 (Signal) w0.25: U2.37 19.55,21.45 21.05,22.95 J4.4
MCU_SWDIO: J4.2 U2.34 | length 11.9
  L1 (Signal) w0.25: U2.34 22.85,18.95 23.59,19.69 J4.2
MCU_SWO: J4.6 U2.39 | length 8.2
  L1 (Signal) w0.25: J4.6 18.51,25.99 19.55,24.95 19.55,23.2 18.55,22.2 U2.39
MCU_VCAP1: C10.1 U2.22 | length 1.6
  L1 (Signal) w0.25: 18.55,13.2 U2.22
  L1 (Signal) w0.3: C10.1 18.55,13.2
USB_D_N: J1.2 U2.32 | length 11.5
  L1 (Signal) w0.281: U2.32 20.208,17.958 28.153,17.958 30.766,17.958 30.839,17.884 31.556,17.884 J1.2
USB_D_P: J1.3 U2.33 | length 11.4
  L1 (Signal) w0.281: U2.33 20.208,18.442 28.354,18.442 J1.3@31.632,18.442
VBUS: C1.1 FB1.1 J1.1
XTAL_IN: C18.1 R7.1 Y1.3 | length 3.4
  L1 (Signal) w0.2: Y1.3@8.89,13.018 C18.1@8.89,14.94 ; C18.1@8.9,14.958 R7.1@8.9,16.438
pads on no net: J1.4 J1.6 J1.7 J1.8 J1.9 J1.10 J1.11 J2.MP1 J2.MP2 U2.2 U2.3 U2.4 U2.10 U2.11 U2.12 U2.13 U2.18 U2.19 U2.20 U2.21 U2.25 U2.27 U2.28 U2.29 U2.30 U2.31 U2.38 U2.40 U2.41 U2.46 U3.2 U3.3 U3.4 U3.5 U3.6 U3.7 U3.14 U3.15 U3.16 U3.17 U3.19 U3.21 U3.22

## Polygon pours and split planes (outlines as drawn)
GND on L1 (Signal) "GND_L01_P008" (solid, pour order 8): 26.1,13.5 26,13.4 26,12.1 25.9,12 24.4,12 24.3,11.9 24.3,10.5 24.4,10.4 25.2,10.4 25.6,10 25.6,6.4 26,6 29.6,6 29.7,6.1 29.7,13.4 29.6,13.5
VBUS on L1 (Signal) "VBUS_L01_P001" (solid, pour order 1): 27.8,17.4 27.7,17.3 27.7,14 27.8,13.9 28.9,13.9 29,14 29,16.8 29.1,16.9 32.464,16.9 32.55,16.986 32.55,17.35 32.464,17.4
+5 on L1 (Signal) "+5_L01_P002" (solid, pour order 2): 27.1,16.7 26.1,16.7 26,16.6 26,15 23.2,12.2 22.4,12.2 22.1,11.9 22.1,11 20.9,9.8 20.9,8.4 21.1,8.2 22.5,8.2 22.9,8.6 22.9,10.1 23.1,10.3 23.7,10.3 24,10.6 24,11.7 26.1,13.8 27,13.8 27.3,14.1 27.3,16.6
+3V3 on L1 (Signal) "+3V3_L01_P003" (solid, pour order 3): 23.3,4.2 22.1,3 22.1,1.8 22.3,1.6 25.8,1.6 26,1.8 26,4.3 26.2,4.5 29.8,4.5 29.9,4.6 29.9,5.7 29.8,5.8 25.8,5.8 24.8,6.8 24.8,9.6 24.7,9.7 23.4,9.7 23.3,9.6
GND on L3 (GND) "GND_L03_P006" (solid, pour order 6): 2,35.2 ccw(c2,34) 0.8,34 0.8,2 ccw(c2,2) 2,0.8 34,0.8 ccw(c34,2) 35.2,2 35.2,34 ccw(c34,34) 34,35.2 19,35.2
GND on L2 (GND) "GND_L02_P005" (solid, pour order 5): 2,35.2 ccw(c2,34) 0.8,34 0.8,2 ccw(c2,2) 2,0.8 34,0.8 ccw(c34,2) 35.2,2 35.2,34 ccw(c34,34) 34,35.2 19,35.2

## Silkscreen, mask and mechanical layers (free items; w line width, h text height)
Top Overlay:
  drawing of 10 lines, arcs and shapes, not listed
  text "BOOT0" at 7.5,34.1 h0.8
  text "SWD" at 25.8,32.6 h1.25
  text "0" at 5.1,32.1 h0.8
  text "1" at 13,32.1 h0.8
  text "RESET" at 28.5,24.7 h0.8
  text "USB" at 31.5,12.3 h1.25
  text "GPIO" at 10.5,7.394 h1.25
Bottom Overlay:
  text "NRST" at 18.9,34.6 h0.8 r90
  text "3V3" at 24.1,33.9 h0.8 r90
  text "GND" at 21.4,33.8 h0.8 r90
  text "SWO" at 18.9,26.6 h0.8 r90
  text "SWCLK" at 21.4,26.6 h0.8 r90
  text "SWDIO" at 24,26.6 h0.8 r90
  text "3V3" at 9.3,3.5 h0.8 r90
  text "PA4" at 10.6,3.5 h0.8 r90
  text "PA5" at 11.9,3.5 h0.8 r90
  text "PA6" at 13.2,3.5 h0.8 r90
  text "PA7" at 14.5,3.5 h0.8 r90
  text "GND" at 15.8,3.5 h0.8 r90
Mechanical 1:
  lines w0.1: 0,1.27 ccw(c1.27,1.27) 1.27,0 34.73,0 ccw(c34.73,1.27) 36,1.27 36,34.73 ccw(c34.73,34.73) 34.73,36 33,36 3,36 1.27,36 ccw(c1.27,34.73) 0,34.73 0,1.27